# EAGLE board BLEduino (EAGLE 6.5.0)
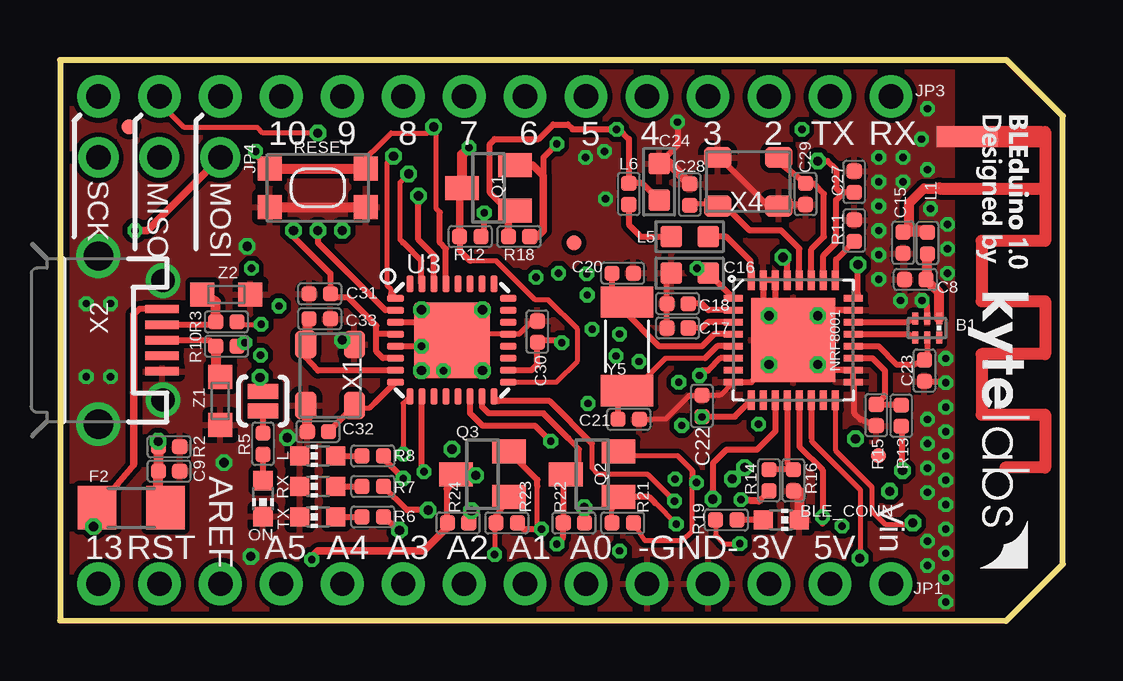
[diagram p0: board, top side]
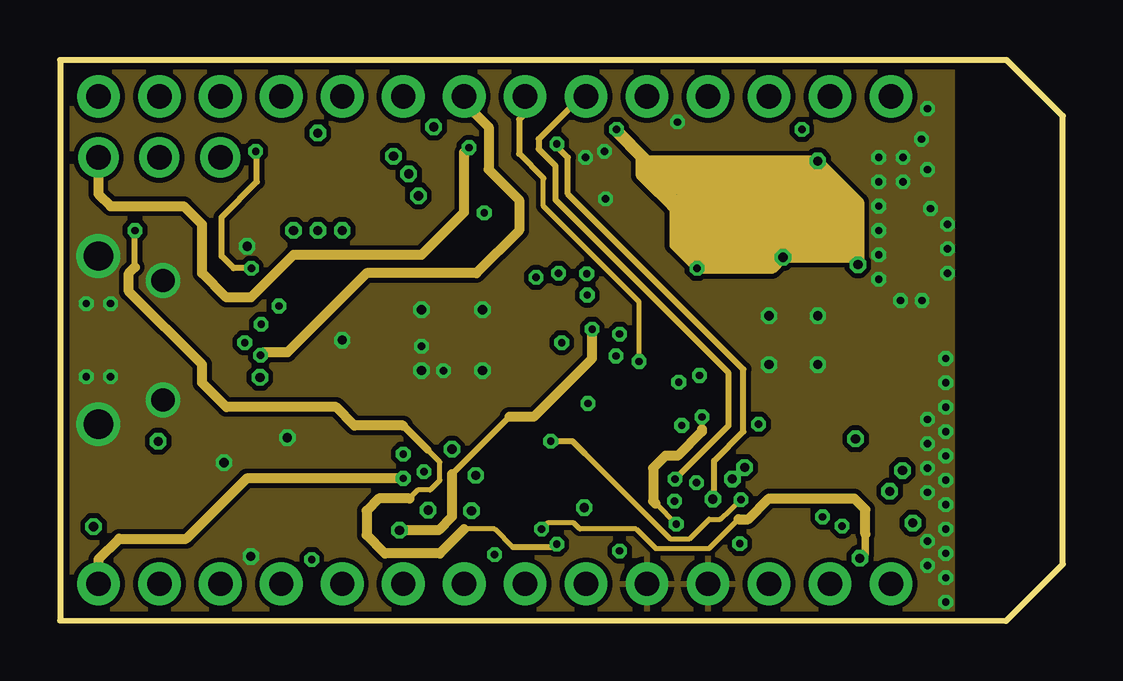
[diagram p1: board, inner layer Inner-Top]
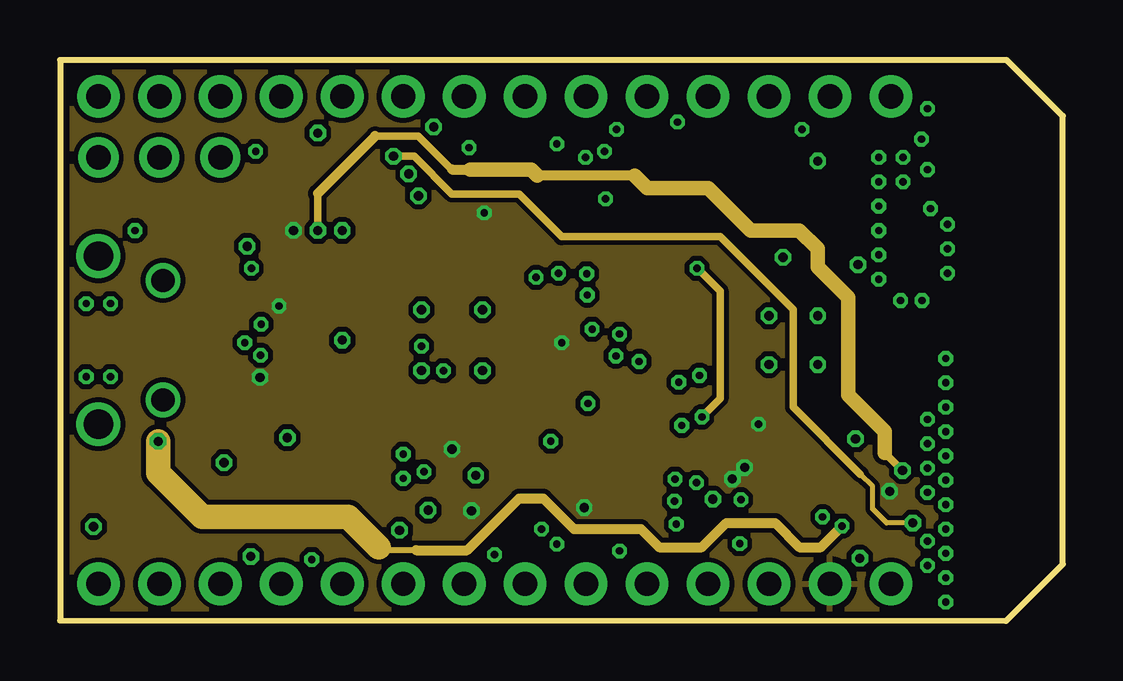
[diagram p2: board, inner layer 5V]
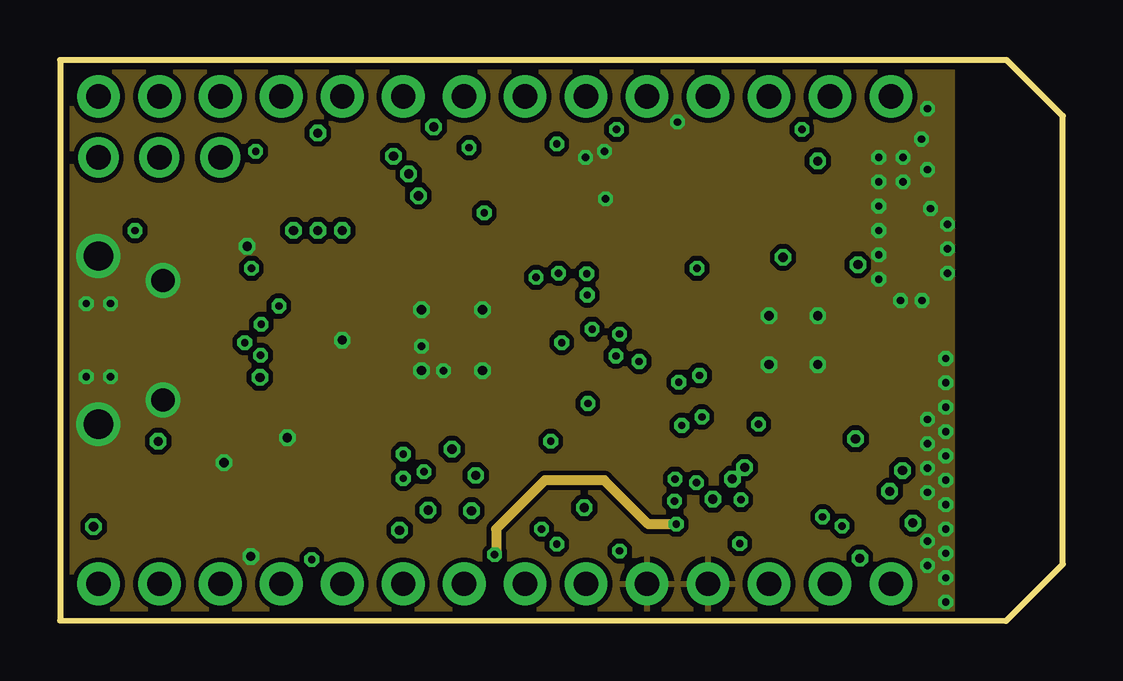
[diagram p3: board, inner layer GND]
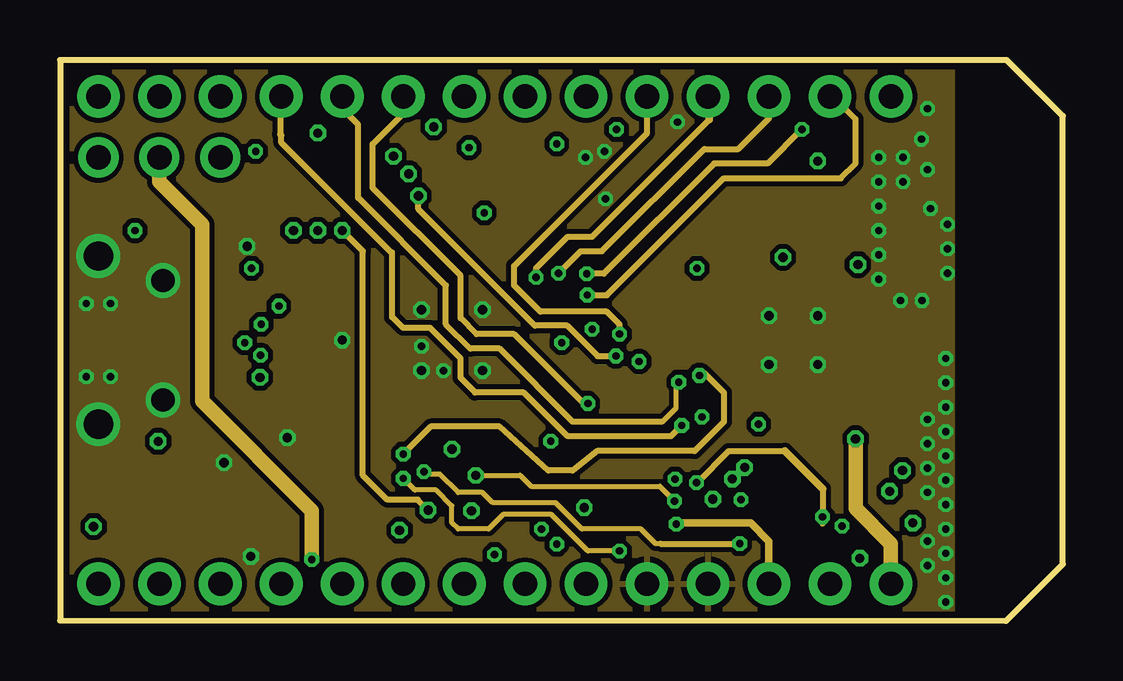
[diagram p4: board, inner layer Inner-Bottom]
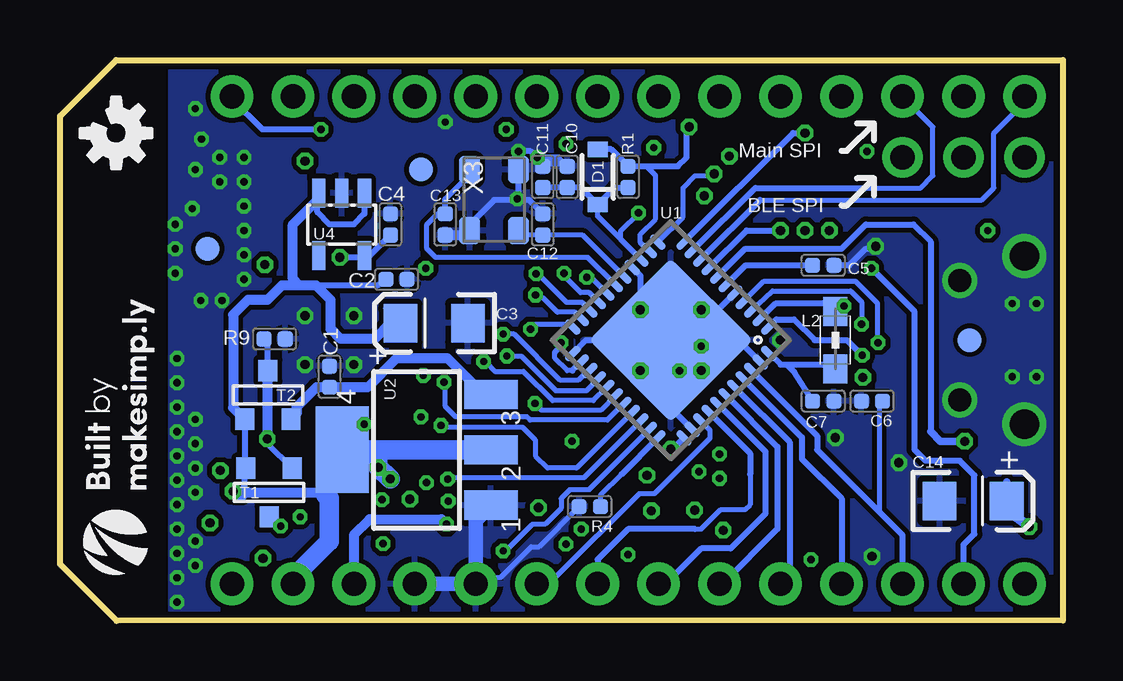
[diagram p5: board, bottom side, seen from below]

Size 41.78 x 23.39 mm. Coordinates in mm from the lower left corner, seen from the top.
Outline: 39.45,23.39 0,23.39 0,0.03 39.42,0 41.78,2.36 41.78,21.06 39.45,23.39
Copper layers (1*2*3*14*15*16): Top 0.035mm / dielectric 0.2mm / Inner-Top 0.0175mm / dielectric 0.2mm / 5V 0.0175mm / dielectric 0.66mm / GND 0.0175mm / dielectric 0.2mm / Inner-Bottom 0.0175mm / dielectric 0.2mm / Bottom 0.035mm
Design rules "SeeedStudio_DRU_no_angle_20130527_6_LAYERS *": minimum track width 6mil, minimum drill 12mil, track to track 6mil, track to pad 6mil, pad to pad 6mil, via to via 6mil, smd to smd 0mil, copper to edge 10mil, drill to drill 10mil, minimum pad ring 6mil, minimum via ring 6mil, stop-mask expansion 2mil, vias tented up to drill 25mil, thermal gap 10mil
Net classes: 0 default: width 0.203 mm

## Footprints (pad centres in the part's own frame; a part is rotated, then mirrored left to right if it is on the bottom)
RN-ANT = smd 0.025 x 0.025: FEED 0,2.159 | smd 2.54 x 0.889: GND -1.143,0
BALUN-0603 = smd 0.25 x 0.5: 1 0.5,0.394; 2 0,0.394; 3 -0.5,0.394; 4 -0.5,-0.406; 5 0,-0.406; 6 0.5,-0.406
CHIP-LED0603 = smd 0.8 x 0.8: A 0,-0.75; C 0,0.75
C0402 = smd 0.635 x 0.635: 1 -0.445,0; 2 0.445,0
EIA3216 = smd 1.4 x 1.6: A 1.4,0; C -1.4,0
C0603 = smd 0.889 x 0.889: 1 -0.762,0; 2 0.762,0
SOD-323 = smd 0.63 x 0.83: 1 -1.15,0; 2 1.15,0
R1206 = smd 1.6 x 1.803: 1 -1.422,0; 2 1.422,0
1X14-CB = drill 1.016 pad 1.778: 1 -16.51,0; 2 -13.97,0; 3 -11.43,0; 4 -8.89,0; 5 -6.35,0; 6 -3.81,0; 7 -1.27,0; 8 1.27,0; 9 3.81,0; 10 6.35,0; 11 8.89,0; 12 11.43,0; 13 13.97,0; 14 16.51,0
MICRO-FIDUCIAL = smd 0.635 x 0.635: 1 0,0
1X03-CLEANBIG = drill 1.016 pad 1.676: 1 -2.54,0; 2 0,0; 3 2.54,0
L0402 = smd 0.635 x 0.635: 1 -0.445,0; 2 0.445,0
0805 = smd 1.2 x 1: 1 -1.2,0; 2 1.2,0
L0603 = smd 0.889 x 0.889: 1 -0.762,0; 2 0.762,0
FITNESSDEVICE_QFN-32 = smd 0.285 x 0.8: 1 -1.75,-2.5; 2 -1.25,-2.5; 3 -0.75,-2.5; 4 -0.25,-2.5; 5 0.25,-2.5; 6 0.75,-2.5; 7 1.25,-2.5; 8 1.75,-2.5; 17 1.75,2.5; 18 1.25,2.5; 19 0.75,2.5; 20 0.25,2.5; 21 -0.25,2.5; 22 -0.75,2.5; 23 -1.25,2.5; 24 -1.75,2.5 | smd 0.8 x 0.285: 9 2.5,-1.75; 10 2.5,-1.25; 11 2.5,-0.75; 12 2.5,-0.25; 13 2.5,0.25; 14 2.5,0.75; 15 2.5,1.25; 16 2.5,1.75; 25 -2.5,1.75; 26 -2.5,1.25; 27 -2.5,0.75; 28 -2.5,0.25; 29 -2.5,-0.25; 30 -2.5,-0.75; 31 -2.5,-1.25; 32 -2.5,-1.75 | smd 3.5 x 3.5: EP 0,0
SOT23 = smd 1 x 1.4: 1 -0.95,-1.1; 2 0.95,-1.1; 3 0,1.1
R0402 = smd 0.635 x 0.635: 1 -0.445,0; 2 0.445,0
KMR2 = smd 1 x 1: 1 2,0.8; 2 2,-0.8; 3 -2,0.8; 4 -2,-0.8
SJ_2S-NOTRACE = smd 0.635 x 1.27: 1 -0.401,0; 2 0.413,0
SOT-23 = smd 0.787 x 0.889: 1 0.025,-1.016; 2 -0.94,1.016; 3 0.991,1.016
QFN44ML7X7 = smd 0.75 x 0.275: 1 -3.275,2.5; 2 -3.275,2; 3 -3.275,1.5; 4 -3.275,1; 5 -3.275,0.5; 6 -3.275,0; 7 -3.275,-0.5; 8 -3.275,-1; 9 -3.275,-1.5; 10 -3.275,-2; 11 -3.275,-2.5; 23 3.275,-2.5; 24 3.275,-2; 25 3.275,-1.5; 26 3.275,-1; 27 3.275,-0.5; 28 3.275,0; 29 3.275,0.5; 30 3.275,1; 31 3.275,1.5; 32 3.275,2; 33 3.275,2.5 | smd 0.275 x 0.75: 12 -2.5,-3.275; 13 -2,-3.275; 14 -1.5,-3.275; 15 -1,-3.275; 16 -0.5,-3.275; 17 0,-3.275; 18 0.5,-3.275; 19 1,-3.275; 20 1.5,-3.275; 21 2,-3.275; 22 2.5,-3.275; 34 2.5,3.275; 35 2,3.275; 36 1.5,3.275; 37 1,3.275; 38 0.5,3.275; 39 0,3.275; 40 -0.5,3.275; 41 -1,3.275; 42 -1.5,3.275; 43 -2,3.275; 44 -2.5,3.275 | smd 4.826 x 4.826: EXP 0,0
LINEAR_SOT223 = smd 1.219 x 2.235: 1 -2.311,-3.099; 2 0,-3.099; 3 2.311,-3.099 | smd 3.6 x 2.2: 4 0,3.099
MLF32X-W/HEAT = smd 0.7 x 0.3: 1 -2.35,1.75; 2 -2.35,1.25; 3 -2.35,0.75; 4 -2.35,0.25; 5 -2.35,-0.25; 6 -2.35,-0.75; 7 -2.35,-1.25; 8 -2.35,-1.75; 17 2.35,-1.75; 18 2.35,-1.25; 19 2.35,-0.75; 20 2.35,-0.25; 21 2.35,0.25; 22 2.35,0.75; 23 2.35,1.25; 24 2.35,1.75 | smd 0.3 x 0.7: 9 -1.75,-2.35; 10 -1.25,-2.35; 11 -0.75,-2.35; 12 -0.25,-2.35; 13 0.25,-2.35; 14 0.75,-2.35; 15 1.25,-2.35; 16 1.75,-2.35; 25 1.75,2.35; 26 1.25,2.35; 27 0.75,2.35; 28 0.25,2.35; 29 -0.25,2.35; 30 -0.75,2.35; 31 -1.25,2.35; 32 -1.75,2.35 | smd 3.175 x 3.175: HEAT 0,0
SOT23-DBV = smd 0.55 x 1.2: 1 -0.95,-1.3; 2 0,-1.3; 3 0.95,-1.3; 4 0.95,1.3; 5 -0.95,1.3
FIDUCIAL-1X2 = smd 1 x 1: 1 0,0
4P-SMD-3.2X2.5 = smd 1.143 x 0.889: 1 -1.27,1.016; 2 -1.27,-1.016; 3 1.27,-1.016; 4 1.27,1.016
SPARKFUN_USB-MICROB = smd 0.35 x 1.4: D+ 0,2.65; D- -0.65,2.65; GND 1.3,2.65; ID 0.65,2.65; VBUS -1.3,2.65
FITNESSDEVICE_CRYSTAL-ABS10 = smd 1.3 x 2.2: P$1 -1.85,0; P$2 1.85,0
CT/CN0603 = smd 1 x 1: 1 -1,0; 2 1,0

## Placement (x,y rotation side)
ANT1  ANTENNA  [RN-ANT]  36.65,20.19 180 top
B1  BALUN0603  [BALUN-0603]  36.13,12.22 0 top
BLE_CONN  blue  [CHIP-LED0603]  30.05,4.22 270 top
C1  100n  [C0402]  30.56,10.19 90 bottom
C2  100n  [C0402]  27.76,14.25 0 bottom
C3  22u  [EIA3216]  26.19,12.42 180 bottom
C4  1uF  [C0402]  28.02,16.54 90 bottom
C5  1uF  [C0402]  9.98,14.83 0 bottom
C6  100n  [C0402]  7.95,9.17 180 bottom
C7  1uF  [C0402]  9.98,9.17 0 bottom
C8  n/a  [C0402]  35.64,14.24 180 top
C9  100n  [C0402]  4.55,6.25 0 top
C10  100n  [C0402]  20.65,18.52 90 bottom
C11  100n  [C0402]  21.67,18.52 90 bottom
C12  22pF  [C0402]  21.67,16.54 270 bottom
C13  22pF  [C0402]  25.73,16.54 90 bottom
C14  22u  [EIA3216]  3.73,5 0 bottom
C15  n/a  [C0402]  35.13,15.77 270 top
C16  1uF  [C0603]  26.24,14.5 180 top
C17  33nF  [C0402]  25.73,12.22 180 top
C18  100nF  [C0402]  25.73,13.23 180 top
C20  15pF  [C0402]  23.44,14.5 0 top
C21  15pF  [C0402]  23.7,8.41 0 top
C22  100nF  [C0402]  26.75,8.97 270 top
C23  2.2nF  [C0402]  36.02,10.44 90 top
C24  1uF  [C0603]  24.97,18.31 90 top
C27  1nF  [C0402]  33.1,18.31 90 top
C28  15pF  [C0402]  26.24,17.78 90 top
C29  15pF  [C0402]  31.06,17.81 270 top
C30  100n  [C0402]  19.89,12.06 90 top
C31  100n  [C0402]  10.82,13.64 180 top
C32  22p  [C0402]  10.74,7.9 180 top
C33  22p  [C0402]  10.82,12.6 0 top
D1  [SOD-323]  19.38,18.52 90 bottom
F2  [R1206]  2.97,4.72 180 top
JP1  [1X14-CB]  18.11,1.55 0 top
JP2  FIDUCIALUFIDUCIAL  [MICRO-FIDUCIAL]  34.11,6.88 0 top
JP3  [1X14-CB]  18.11,21.87 0 top
JP4  [1X03-CLEANBIG]  4.14,19.33 0 top
JP5  FIDUCIALUFIDUCIAL  [MICRO-FIDUCIAL]  21.41,15.77 0 top
JP6  FIDUCIALUFIDUCIAL  [MICRO-FIDUCIAL]  2.87,20.6 0 top
L  yellow  [CHIP-LED0603]  10.74,6.88 90 top
L1  n/a  [L0402]  36.14,15.76 90 top
L2  MH2029-300Y  [0805]  9.47,11.71 270 bottom
L5  10uH  [L0603]  26.24,16.03 180 top
L6  15nH  [L0402]  23.7,17.81 90 top
LOGO_BOTTOM  [OSHW-LOGO-S]  39.45,20.35 135 top
LOGO_TOP  [V3_KYTELABS_TOP]  38.43,21.08 270 top
NRF8001  FITNESSDEVICE_NRF8001  [FITNESSDEVICE_QFN-32]  30.56,11.71 270 top
ON  green  [CHIP-LED0603]  8.46,5.11 180 top
Q1  BSS138  [SOT23]  17.86,18.06 90 top
Q2  BSS138  [SOT23]  22.17,6.12 90 top
Q3  BSS138  [SOT23]  17.6,6.12 90 top
R1  10K  [R0402]  18.11,18.52 90 bottom
R2  10K  [R0402]  4.55,7.26 180 top
R3  22  [R0402]  6.93,12.47 180 top
R4  10K  [R0402]  19.71,4.78 180 bottom
R5  1K  [R0402]  8.46,7.39 270 top
R6  1K  [R0402]  13.03,4.34 180 top
R7  1K  [R0402]  13.03,5.61 180 top
R8  1K  [R0402]  13.03,6.88 180 top
R9  10K  [R0402]  32.84,11.76 180 bottom
R10  22  [R0402]  6.93,11.46 180 top
R11  22K  [R0402]  33.1,16.28 90 top
R12  10K  [R0402]  17.09,16.03 180 top
R13  10K  [R0402]  35.05,8.56 90 top
R14  10K  [R0402]  29.54,5.87 90 top
R15  20K  [R0402]  34.01,8.59 90 top
R16  20K  [R0402]  30.56,5.87 90 top
R18  10K  [R0402]  19.13,16.03 180 top
R19  1K  [R0402]  27.76,4.22 180 top
R21  10K  [R0402]  23.44,4.09 180 top
R22  10K  [R0402]  21.41,4.09 180 top
R23  10K  [R0402]  18.62,4.09 180 top
R24  10K  [R0402]  16.59,4.09 180 top
RESET  SPST_TACT-KMR2  [KMR2]  10.74,18.06 0 top
RX  yellow  [CHIP-LED0603]  10.74,5.61 90 top
SILK_2  [V3_MAKESIMPLY_BOTTOM]  37.67,1.8 90 bottom
SJ1  SOLDERJUMPERNC2  [SJ_2S-NOTRACE]  8.46,9.17 270 top
T1  FDN340P/PMV48XP  [SOT-23]  33.1,5.36 0 bottom
T2  PMV48XP  [SOT-23]  33.1,9.42 180 bottom
TX  yellow  [CHIP-LED0603]  10.74,4.34 90 top
U1  ATMEGA32U4-XUMU  [QFN44ML7X7]  16.33,11.71 225 bottom
U2  NCP1117-5  [LINEAR_SOT223]  26.92,7.14 90 bottom
U3  ATMEGA8/168/328MLF  [MLF32X-W/HEAT]  16.33,11.71 0 top
U4  LP2985-33DBVR  [SOT23-DBV]  30.05,16.54 180 bottom
U$28  FIDUCIAL1X2  [FIDUCIAL-1X2]  3.89,11.71 0 bottom
U$29  FIDUCIAL1X2  [FIDUCIAL-1X2]  26.75,18.82 0 bottom
U$53  FIDUCIAL1X2  [FIDUCIAL-1X2]  35.64,15.52 0 bottom
X1  [4P-SMD-3.2X2.5]  11.25,10.26 90 top
X2  SPARKFUN_USB-MICROB  [SPARKFUN_USB-MICROB]  1.6,11.71 270 top
X3  [4P-SMD-3.2X2.5]  23.7,17.55 270 bottom
X4  [4P-SMD-3.2X2.5]  28.68,18.31 180 top
Y5  Y5  [FITNESSDEVICE_CRYSTAL-ABS10]  23.62,11.46 270 top
Z1  CG0603MLC-05E  [CT/CN0603]  6.68,9.17 270 top
Z2  CG0603MLC-05E  [CT/CN0603]  6.93,13.61 0 top

## Library data of the parts
ANT1 BLE_CONN F2 JP1 JP3 JP4 L ON Q1-Q3 RESET RX TX = adafruit
B1 C3 C14 D1 JP2 JP5 JP6 LOGO_BOTTOM SJ1 U$28 U$29 U$53 = SparkFun
C1 C2 C4-C13 C15-C18 C20-C24 C27-C33 L1 L5 L6 R1-R16 R18 R19 R21-R24 X1 X3 X4 = Discrete
L2 = Wuerth_Elektronik_eiSos_V6
LOGO_TOP SILK_2 = Custom
NRF8001 Y5 = bluetooth
T1 T2 = zetex
U1 U2 U4 = SmartPrj
U3 = IC
X2 = Micro_USB
Z1 Z2 = varistor

## Nets
3V3: C4.1 C16.1 C22.2 C24.1 C27.1 JP1.12 L6.2 NRF8001.1 NRF8001.9 NRF8001.24 NRF8001.26 NRF8001.29 Q1.1 Q2.1 Q3.1 R18.2 R21.2 R23.2 U4.5
+5V: C2.1 C3.A C10.1 C11.1 C30.1 C31.1 D1.1 JP1.13 L2.1 R1.1 R12.1 R22.1 R24.1 SJ1.1 T1.2 T2.3 U1.2 U1.14 U1.24 U1.34 U2.2 U2.4 U3.4 U3.6 U3.18 U4.1 U4.3
+VIN: C1.1 T2.2 U2.3
A0: JP1.9 U1.36
A1: JP1.8 U1.37
A2: JP1.7 U1.38
A3: JP1.6 U1.39
A4: JP1.5 U1.40
A5: JP1.4 U1.41
AREF: C6.1 JP1.3 U1.42
AVCC: C7.1 L2.2 U1.44
BLE_ACTIVE: NRF8001.6 U3.9
BLE_MISO: JP4.2 Q3.3 R24.2 U3.16
BLE_MISO_SHIFTED: NRF8001.14 Q3.2 R23.1
BLE_MOSI: JP4.3 Q2.3 R22.2 U3.15
BLE_MOSI_SHIFTED: NRF8001.13 Q2.2 R21.1
BLE_RDNY: NRF8001.16 U3.1
BLE_REQN: R14.1 U3.14
BLE_REQN_SHIFTED: NRF8001.12 R14.2 R16.2
BLE_RESET: R13.1 U3.2
BLE_RESET_SHIFTED: NRF8001.19 R13.2 R15.2
BLE_SCK: JP4.1 Q1.3 R12.2 U3.17
BLE_SCK_SHIFTED: NRF8001.11 Q1.2 R18.1
D0/RX: JP3.14 U1.20
D1/TX: JP3.13 U1.21
D2/SDA: JP3.12 U1.19
D3/SCL: JP3.11 U1.18
D4*: JP3.10 U1.25
D5*: JP3.9 U1.31
D6*: JP3.8 U1.27
D7: JP3.7 U1.1
D+: R10.2 X2.D+ Z1.1
D-: R3.2 X2.D- Z2.1
GND: ANT1.GND B1.2 BLE_CONN.C C1.2 C2.2 C3.C C4.2 C5.2 C6.2 C7.2 C8.2 C9.2 C10.2 C11.2 C12.1 C13.1 C14.C C15.2 C16.2 C17.2 C18.2 C20.2 C21.2 C22.1 C23.1 C24.2 C27.2 C28.2 C29.2 C30.2 C31.2 C32.2 C33.2 JP1.10 JP1.11 L.C NRF8001.8 NRF8001.17 NRF8001.18 NRF8001.23 NRF8001.30 NRF8001.31 NRF8001.EP ON.C R2.1 R4.2 R9.1 R11.2 R15.1 R16.1 RESET.2 RESET.4 RX.C TX.C U1.5 U1.15 U1.23 U1.35 U1.43 U1.EXP U2.1 U3.3 U3.5 U3.21 U3.HEAT U4.2 X1.1 X1.3 X2.GND X3.1 X3.3 X4.1 X4.3 Z1.2 Z2.2
HWB: R4.1 U1.33
IO8: JP3.6 U1.28
IO9*: JP3.5 U1.29
IO10*: JP3.4 U1.30
IO11*: U1.12 U3.31
IO12*: U1.26 U3.30
IO13*: JP1.1 R8.1 U1.32
MISO: JP3.2 U1.11
MOSI: JP3.3 U1.10
N$1: C33.1 U3.7 X1.4
N$2: R7.2 RX.A
N$3: ON.A R5.2
N$4: R6.2 TX.A
N$5: C32.1 U3.8 X1.2
N$6: R19.2 U3.10
N$7: L.A R8.2
N$8: BLE_CONN.A R19.1
N$9: ANT1.FEED C15.1 L1.2
N$13: C18.1 NRF8001.2
N$14: R5.1 SJ1.2
N$15: L5.1 NRF8001.32
N$17: L5.2 L6.1
N$18: C17.1 NRF8001.3
N$19: C20.1 NRF8001.4 Y5.P$1
N$20: C21.1 NRF8001.5 Y5.P$2
N$23: B1.5 C23.2 NRF8001.20
N$24: B1.3 NRF8001.22
N$25: B1.4 NRF8001.21
N$26: B1.1 C8.1 L1.1
N$28: NRF8001.25 R11.1
N$29: C28.1 NRF8001.28 X4.4
N$30: C29.1 NRF8001.27 X4.2
RD_N: R3.1 U1.3
RD_P: R10.1 U1.4
RESET: D1.2 JP1.2 R1.2 RESET.1 RESET.3 U1.13 U3.29
RXLED/SS: R7.1 U1.8
SCK: JP3.1 U1.9
TXLED: R6.1 U1.22
UCAP: C5.1 U1.6
VIN: JP1.14 R9.2 T1.3 T2.1
VUSB: C9.1 F2.1 R2.2 T1.1 U1.7
VUSBD: C14.A F2.2 X2.VBUS
XTAL1: C13.2 U1.17 X3.2
XTAL2: C12.2 U1.16 X3.4

## Tracks (layer width: path | path; a pad name or v marks a point on that pad's centre or on a via)
3V3  (via drill 0.3, 0.38)
  Top 0.203: R21.2 23,4.64 Q2.1 | 24.8,4.92 v25.68,4.04 | R23.2 18.11,3.77 v18.11,2.77
  Top 0.254: NRF8001.1 C16.1 26.77,14.5 v26.54,14.71 | C22.2 28.12,8.52 NRF8001.9 | NRF8001.24 33.25,13.65 v33.25,14.86 | 30.31,15.01 30.15,15.16 v30.12,15.16 30.31,14.98 NRF8001.29 | Q3.1 18.17,4.39 R23.2 | Q1.1 18.65,17.11 17.91,17.86 17.91,19.89 18.11,20.09 19.94,20.09 20.55,20.7 21.16,20.7 21.36,20.5 v23.19,20.5 23.29,20.5 23.7,20.09 L6.2 24.27,18.25 C24.1 | NRF8001.26 31.81,15.25 32.33,15.77 32.33,17.55 32.59,17.81 | v31.57,19.18 31.98,19.18 32.33,18.82 32.33,18.06 32.59,17.81 | C27.1 32.65,17.87 32.59,17.81 | 24.8,4.92 24.55,5.17 Q2.1
  Top 0.305: Q1.1 18.68,16.88 R18.2 | C22.2 v26.75,8.51
  Inner-Top 0.203: v26.75,8.51 26.75,8 | 24.82,4.9 v25.68,4.04 | 24.71,18.82 24.71,18.97 v23.19,20.5 | 29.54,15.27 29.79,15.27 30.02,15.27 v30.12,15.16 | v31.57,19.18 31.6,19.18 31.64,19.14
  Inner-Top 0.406: v23.19,20.5 23.19,20.4 | 30.12,15.14 29.67,14.68 26.59,14.68 v26.54,14.71 25.6,15.67 25.6,17.17 25.98,17.55 25.73,17.55 25.48,17.3 25.48,17.81 24.71,18.57 24.71,18.82 24.21,19.33 | v23.19,20.5 24.49,19.2 31.57,19.2 31.64,19.14 33.3,17.48 33.3,14.91 v33.25,14.86 32.94,15.16 v30.12,15.16 | 26.75,8 26.75,7.9 25.73,6.88 25.22,6.88 24.71,6.38 24.71,5 24.82,4.9 | v23.19,20.5 23.19,20.35 24.21,19.33 | 23.19,20.6 v23.19,20.5 | 25.98,17.04 25.73,17.04 24.21,18.57 24.21,19.33
  Inner-Top 0.813: 32.84,15.77 32.84,17.3 31.32,18.82 25.22,18.82 | 24.71,18.82 25.22,18.82 | 25.22,18.82 26.49,17.55 | 26.49,17.55 26.49,16.54 27,16.03 29.54,16.03 29.79,16.28 32.33,16.28 32.33,16.79 31.06,18.06 26.75,18.06 26.49,18.31 26.49,17.55 | 26.49,17.55 27.25,16.79 31.32,16.79 | 31.57,16.79 31.32,16.79 | 31.32,16.79 30.81,17.3 27.51,17.3 27.25,17.55 | 25.98,17.04 25.98,16.03 26.75,15.27 29.54,15.27 | 29.79,15.27 30.05,15.52 32.84,15.52
  5V 0.305: v26.54,14.71 27.51,13.77 27.51,9.27 v26.75,8.51
  GND 0.406: v25.68,4.04 24.51,4.04 22.68,5.87 20.21,5.87 18.17,3.84 18.17,2.83 v18.11,2.77
  Inner-Bottom 0.305: JP1.12 29.54,3.33 28.78,4.09 25.73,4.09 v25.68,4.04
  Bottom 0.254: v30.12,15.16 29.17,15.16 U4.5 28.87,15.24 C4.1 27.95,16.09
  Bottom 0.406: v25.68,4.04 25.88,4.24 28.88,4.24 29.54,3.58 JP1.12
+5V  (via drill 0.3, 0.38)
  Top 0.254: U3.6 13.45,10.96 13.18,11.23 13.18,11.96 | U3.4 13.8,11.96 13.79,11.96 13.18,11.96 | 21.92,4.03 R22.1 21.86,4.41 v21.84,4.72 | R24.1 17.03,4.56 v17.15,4.6 | SJ1.1 8.46,10.03 v8.33,10.16 | U3.18 19.65,10.46 19.89,10.69 C30.1 19.89,11.71 20.8,11.71 v20.9,11.61 | R12.1 17.68,16.03 v17.68,17.02 | v9.73,16.28 9.73,16.03 11.27,14.49 C31.1 11.42,13.49 12.01,13.49 13.18,12.32 13.18,11.96
  Bottom 0.203: D1.1 19.38,16.88 U1.14 17.6,15.09 18.42,15.9 18.42,16.28 v17.68,17.02 | 20.43,10.44 20.65,10.44 21.16,10.95 21.16,11.2
  Bottom 0.254: C11.1 C10.1 20.09,18.07 D1.1 18.68,18.07 R1.1 | L2.1 9.9,13.23 11.98,13.23 U1.2 | T2.3 34.09,6.43 T1.2 34.11,6.3 34.11,5.61 34.49,5.23 v34.57,5.41 | C3.A 28.21,13.04 | L2.1 9.47,12.47 | U4.1 29.1,16.98 29.54,16.54 30.56,16.54 31.06,17.04 31.06,17.77 U4.3 | C2.1 28.27,14.25 28.52,14 31.12,14 | U1.34 16.27,7.16 v16.33,7.16 | L2.1 9.44,12.81 v9.12,13.13 | 21.16,11.2 20.9,11.46 v20.9,11.61 | 20.43,10.44 U1.24
  Bottom 0.305: v29.11,8.2 29.11,7.21 29.03,7.14
  Bottom 0.406: 34.49,5.23 34.19,5.23 34.06,5.36 30.81,5.36 | 30.81,5.36 30.1,6.07 30.1,7.06 U2.4 | 30.71,5.26 30.81,5.36 | C3.A 28.02,12.42 28.68,11.76 30.1,11.76 30.51,12.17 30.51,13.39 31.12,14 31.83,14 | 31.83,14 32.54,14 33.15,13.39 33.96,13.39 34.57,12.78 34.57,8.89 T2.3 | 31.83,14 32.08,14.25 32.08,16.54 31,17.62 U4.3
  Bottom 0.813: U2.2 29.03,7.14 U2.4 28.58,7.09 v28.52,6.4 v28.02,5.92 | JP1.13 32.08,1.8 30.56,3.33 30.56,5.11 30.71,5.26
  pour 5V (isolate 0.203): -2.72,26.19 37.16,26.19 37.16,-2.77 -2.72,-2.77
+VIN
  Bottom 0.406: T2.2 31.93,8.64 31.93,8.92 31.1,9.74 C1.1 28.97,9.74 27.76,10.95 25.63,10.95 24.54,9.86 24.54,9.45 U2.3
A0
  Bottom 0.203: U1.36 14.71,7.96 14.71,7.62 17.02,5.31 17.65,5.31 21.16,1.8 21.79,1.8
  Bottom 0.254: 21.79,1.8 21.92,1.68 JP1.9
A1
  Bottom 0.203: 15.32,3.84 15.06,3.84 14.25,4.65 13.23,4.65 13.03,4.85 13.03,6.12
  Bottom 0.254: U1.37 13.03,6.99 13.03,6.12 | 15.32,3.84 18.11,3.84 19.38,2.57 JP1.8
A2
  Bottom 0.254: U1.38 12.4,7.07 12.4,4.47 13.84,3.02 15.06,3.02 16.54,1.55 JP1.7
A3
  Bottom 0.254: U1.39 11.89,7.26 11.89,3.84 14.17,1.55 JP1.6
A4
  Bottom 0.254: U1.40 11.38,7.46 11.38,2.06 11.76,1.68 JP1.5
A5
  Bottom 0.254: U1.41 10.87,7.66 10.87,6.76 9.22,5.11 JP1.4
AREF
  Bottom 0.203: C6.1 7.65,9.03 7.65,4.55
  Bottom 0.254: U1.42 12.96,10.44 10.24,7.72 10.24,7.14 7.65,4.55 6.68,3.58 JP1.3
AVCC
  Bottom 0.254: U1.44 12.23,11.16 11.76,10.69 11.51,10.69 | 11.51,10.69 9.56,10.69 L2.2 | C7.1 11.19,10.38 11.51,10.69
BLE_ACTIVE  (via drill 0.3)
  Top 0.203: U3.9 14.3,9.08 v14.3,6.96
  Top 0.254: NRF8001.6 27.52,10.96 27,10.44 26.75,10.44 v26.64,10.24
  Inner-Bottom 0.254: v26.64,10.24 26.85,10.34 27.66,9.53 27.66,8.31 26.44,7.09 22.38,7.09 21.36,6.27 20.35,6.27 18.31,8.1 15.44,8.1 v14.3,6.96
BLE_MISO  (via drill 0.3, 0.38)
  Top 0.203: Q3.3 v17.32,6.07 | U3.16 18.08,9.15 | v25.6,5 24.49,6.12 22.43,6.12 22.17,6.38 22.17,7.39
  Top 0.254: 16.14,5.51 R24.2 16.13,3.84 16.1,3.86 | 22.17,7.39 20.4,9.17 18.27,9.17 U3.16
  Top 0.305: 16.14,5.51 Q3.3 | 16.13,3.86 16.1,3.86 15.16,2.92 10.74,2.92 10.49,2.67 v10.49,2.57
  Inner-Bottom 0.203: v17.32,6.07 19.18,6.07 19.63,5.61 24.99,5.61 v25.6,5
  Inner-Bottom 0.61: v10.49,2.57 10.49,4.6 5.92,9.17 5.92,16.54 4.14,18.31 JP4.2
BLE_MISO_SHIFTED  (via drill 0.3, 0.38)
  Top 0.203: 19.89,5.63 19.89,4.01 v20.07,3.84 | 31.32,7.65 31.32,7.49 33.35,5.46 33.35,2.64 v33.33,2.62
  Top 0.254: 18.77,6.88 Q3.2 19.89,5.89 19.89,5.63 | NRF8001.14 31.31,7.66 31.32,7.65 | R23.1 19.32,3.84 v20.07,3.84
  Inner-Top 0.203: 28.27,4.24 27.05,3.02 24.82,3.02 24,3.84 21.67,3.84 21.41,4.09 20.32,4.09 v20.07,3.84
  Inner-Top 0.305: 33.55,3.63 33.55,2.77 33.48,2.77 v33.33,2.62
  Inner-Top 0.406: 28.27,4.24 28.68,4.24 29.54,5.11 33.1,5.11 33.55,4.65 33.55,3.63
BLE_MOSI  (via drill 0.3)
  Top 0.203: 21.41,6.21 Q2.3 21.64,6.18 21.64,7.16 21.18,7.62
  Top 0.254: Q2.3 20.97,5.76 R22.2 | R22.2 20.96,3.82 | 21.18,7.62 20.14,8.66 17.86,8.66 17.58,8.94 U3.15 | v20.7,3.2 20.97,3.47 R22.2
  Top 0.305: JP4.3 3.63,16.28 v3.12,16.28
  Inner-Top 0.203: 16.84,3.84 18.11,3.84 18.87,3.07 | 14.55,5.11 14.91,5.46 15.42,5.46 15.82,5.87 15.82,6.63 15.32,7.14
  Inner-Top 0.254: 3.12,14.76 v3.12,16.28 | v20.7,3.2 20.57,3.07 18.87,3.07
  Inner-Top 0.305: 15.32,7.14 14.3,8.15
  Inner-Top 0.406: 16.84,3.84 15.82,2.82 13.54,2.82 12.78,3.58 12.78,4.6 13.28,5.11 14.55,5.11 | 14.3,8.15 12.27,8.15 11.51,8.92 6.93,8.92 5.92,9.93 5.92,10.69 2.87,13.74 2.87,14.5 3.12,14.76
BLE_MOSI_SHIFTED  (via drill 0.3)
  Top 0.203: Q2.2 23.34,6.88 25.73,6.88 26.34,6.27 26.34,3.76 25.93,3.35 24.37,3.35 R21.1
  Top 0.254: NRF8001.13 30.81,7.27 31.78,6.3 v31.78,4.34 31.78,4.06 | 26.34,6.27 26.34,5.94 v26.52,5.77
  Inner-Bottom 0.254: v26.52,5.77 26.54,5.77 27.86,7.09 30.2,7.09 | 31.78,5.51 v31.78,4.34 31.78,4.06
  Inner-Bottom 0.305: 30.2,7.09 31.78,5.51
BLE_RDNY  (via drill 0.38)
  Top 0.203: 13.79,13.65 13.79,13.82 13.64,13.97 13.64,19.13 v13.89,19.38 | NRF8001.16 32.31,7.11 33.83,5.59 33.83,4.6 34.39,4.04 35.31,4.04
  Top 0.254: U3.1 13.79,13.65 | 35.31,4.04 35.48,4.04 v35.53,4.09
  5V 0.203: v35.53,4.09 34.44,4.09 33.86,4.67 33.86,5.61 33.35,6.12
  5V 0.305: v13.89,19.38 14.76,19.38 16.33,17.81 19.13,17.81 20.9,16.03 27.51,16.03 30.56,12.98 30.56,8.92 33.35,6.12
BLE_REQN  (via drill 0.3)
  Top 0.203: 29.17,5.05 R14.1
  Top 0.254: U3.14 17.08,8.67 17.6,8.15 19.79,8.15 v20.45,7.49
  Top 0.305: v28.37,5.05 29.12,5 29.17,5.05
  Inner-Top 0.203: 21.87,6.99 25.43,3.43 26.24,3.43 27.05,4.24 27.51,4.24 v28.37,5.05
  Inner-Top 0.254: 21.87,6.99 21.36,7.49 v20.45,7.49
BLE_REQN_SHIFTED
  Top 0.254: NRF8001.12 30.31,8.41 | 30.31,8.41 30.3,8.41 | 30.31,8.41 30.31,6.56 R16.2 R14.2
BLE_RESET  (via drill 0.38)
  Top 0.254: U3.2 13.56,12.96 10.74,15.77 v10.74,16.28 | v35.1,6.27 35.1,8.32 R13.1
  5V 0.305: v35.1,6.27 34.37,7.01 | 16.33,18.82 14.94,20.22 13.13,20.22 | 10.74,17.83 v10.74,16.28
  5V 0.406: 13.13,20.22 10.74,17.83 | 23.95,18.57 19.89,18.57 | 16.33,18.82 17.09,18.82
  5V 0.61: 34.37,7.01 34.37,7.9 32.84,9.42 32.84,13.49 31.57,14.76 31.57,15.52 30.81,16.28 28.78,16.28 27,18.06 24.46,18.06 23.95,18.57 | 19.89,18.57 19.63,18.82 17.09,18.82
BLE_RESET_SHIFTED
  Top 0.254: R13.2 35.03,9.03 R15.2 34.37,9.39 34.37,10.44 33.85,10.96 NRF8001.19
BLE_SCK  (via drill 0.3)
  Top 0.203: U3.17 20.68,9.96 21.56,10.85 21.56,12.17 20.35,13.39 19.81,13.39 18.19,15.01 17.09,15.01
  Top 0.254: R12.2 16.65,15.46 17.09,15.01
  Top 0.305: R12.2 16.65,17.91 Q1.3
  Top 0.406: Q1.3 16.76,19.45 v17.04,19.74
  Inner-Top 0.406: JP4.1 1.6,17.81 2.11,17.3 5.16,17.3 5.92,16.54 5.92,14.5 6.93,13.49 7.95,13.49 9.73,15.27 15.06,15.27 16.84,17.04 16.84,19.53 v17.04,19.74
BLE_SCK_SHIFTED  (via drill 0.3, 0.38)
  Top 0.203: 19.89,16.03 19.94,16.03 20.14,16.23
  Top 0.254: NRF8001.11 29.81,7.91 29.03,7.14 27.76,7.14 27.2,6.58 v27.2,5.08 | v20.7,19.89 20.14,19.33 20.14,18.57
  Top 0.305: R18.1 19.89,16.03 20.14,16.28 20.14,18.57 19.7,19.01 Q1.2
  Inner-Top 0.203: v27.2,5.08 27.2,5.31 27.25,5.36
  Inner-Top 0.254: 27.25,5.36 27.25,6.68 28.47,7.9 28.47,10.49 21.16,17.81 21.16,19.33 20.7,19.79 v20.7,19.89
D0/RX  (via drill 0.3)
  Inner-Bottom 0.254: v30.91,20.5 29.49,19.08 27.25,19.08 22.66,14.48 v21.95,14.48
  Bottom 0.203: U1.20 20.03,13.28 20.68,13.28 21.87,14.48 v21.95,14.48
  Bottom 0.254: v30.91,20.5 33.35,20.5 34.62,21.77 JP3.14
D1/TX  (via drill 0.3)
  Inner-Bottom 0.254: v21.97,13.59 22.78,13.59 27.66,18.47 32.54,18.47 33.15,19.08 33.15,20.93 32.21,21.87 JP3.13
  Bottom 0.203: U1.21 20.33,12.88 21.06,12.88 21.64,13.46 v21.97,13.59
D2/SDA  (via drill 0.3)
  Inner-Bottom 0.254: v20.78,14.5 21.69,15.42 22.58,15.42 26.85,19.69 28.27,19.69 29.54,20.96 JP3.12
  Bottom 0.203: U1.19 19.73,13.69 20.09,13.69 20.78,14.38 v20.78,14.5
D3/SCL  (via drill 0.3)
  Inner-Bottom 0.254: v19.84,14.33 19.84,14.71 21.16,16.03 22.17,16.03 27.05,20.9
  Inner-Bottom 0.305: 27.05,20.9 27.05,21.82 JP3.11
  Bottom 0.203: U1.18 19.66,14.33 v19.84,14.33
D4*  (via drill 0.3)
  Inner-Bottom 0.254: v23.32,11.96 23.32,12.37 22.78,12.9 20.02,12.9 18.92,14 18.92,14.81 24.46,20.35 JP3.10
  Bottom 0.203: U1.25 19.77,10.45 20.19,10.03 20.93,10.03 22.86,11.96 v23.32,11.96
D5*  (via drill 0.3)
  Inner-Top 0.254: v25.63,5.92 27.86,8.15 27.86,10.34 20.65,17.55 20.65,18.97 19.94,19.69 19.94,20.09 21.72,21.87 JP3.9
  Bottom 0.203: v25.63,5.92 25.58,5.97 19.95,5.97 U1.31
D6*  (via drill 0.3)
  Inner-Top 0.203: v24.13,10.82 24.13,13.31 20.14,17.3 20.14,18.47
  Inner-Top 0.254: 20.14,18.47 19.13,19.48 19.13,20.9 19.38,21.16 JP3.8
  Bottom 0.203: U1.27 19.55,9.19 21.26,9.19 22.48,10.41 23.67,10.41 24.03,10.77 v24.13,10.82
D7  (via drill 0.3)
  Inner-Top 0.254: JP3.7 16.84,21.62 | 8.48,11.2 v8.36,11.07
  Inner-Top 0.406: 16.84,21.62 17.86,20.6 17.86,18.82 19.13,17.55 19.13,16.28 17.35,14.5 12.78,14.5 9.47,11.2 8.48,11.2
  Bottom 0.254: U1.1 11.93,12.57 11.2,12.57 10.34,11.71 8.99,11.71 v8.36,11.07
D+
  Top 0.254: X2.D+ 6.24,11.71 R10.2
  Top 0.406: R10.2 6.49,10.36 Z1.1
D-
  Top 0.254: 6.38,12.36 R3.2 | 6.39,12.37 R3.2 | X2.D- 6.49,12.36 R3.2
  Top 0.406: R3.2 6.49,13.31 Z2.1
GND  (via drill 0.3, 0.38, 0.97, 1.22)
  Top 0.203: 19.08,11.96 U3.21 | C30.2 19.67,12.51 19.13,11.96 U3.21 | U3.21 17.35,11.96 | 17.35,11.96 17.09,11.96 | 17.09,11.96 16.59,11.96 U3.HEAT | U3.HEAT 17.09,11.71 17.35,11.96 | U3.HEAT v17.6,10.44 17.6,11.46 17.09,11.96 | C22.1 26.48,9.41 | C21.2 25.22,8.41 26.23,9.41 C22.1 | NRF8001.8 27.51,9.41 C22.1 | X1.1 10.24,7.96 C32.2
  Top 0.254: 29.31,12.45 NRF8001.31 NRF8001.30 29.81,12.74 29.79,12.73 29.79,12.47 | NRF8001.EP 30.05,11.71 | 30.05,11.71 29.31,12.45 | 29.31,12.45 29.29,12.47 29.79,12.47 | 29.79,12.47 NRF8001.EP | NRF8001.EP 31.81,10.46 NRF8001.18 NRF8001.17 33.1,9.92 33.1,8.66 33.36,8.39 R15.1 | NRF8001.8 28.81,9.96 29.03,10.19 29.03,10.69 30.05,11.71 | NRF8001.23 31.81,12.96 NRF8001.EP | C17.2 25.29,14.31 C16.2 | U3.5 16.08,11.46 U3.HEAT | U3.3 15.58,12.46 U3.HEAT | 16.58,11.96 U3.HEAT | B1.2 36.13,13.15 v35.92,13.36 | C28.2 26.34,18.05 | C29.2 29.45,17.36 27.57,19.24 | v25.73,20.8 25.73,19.84 C24.2 | C23.1 36.84,9.99 v36.91,9.93
  Top 0.305: v31.57,12.73 NRF8001.EP
  Top 0.406: C32.2 10.3,8.75 | RESET.4 RESET.2 | R16.1 30.8,5.42 BLE_CONN.C | C28.2 25.4,19.08 C24.2 | C15.2 35.04,15.24 | 35.13,14.25 35.18,14.25 C8.2
  Bottom 0.203: 20.17,4.75 21.82,3.1 22.15,3.1 23.44,1.8 24.13,1.8 24.49,1.45
  Bottom 0.254: U1.5 14.36,12.98 v15.06,12.98 14.77,12.98 U1.43 | U1.15 17.6,14.39 v17.6,12.98 18.11,12.98 19.38,11.71 19.87,11.71 U1.23 | U1.35 17.6,10.15 v17.6,10.44 | R4.2 20.16,4.76 20.17,4.75 | U3.HEAT 15.57,11.71 | 20.65,19.08 21.67,19.08 21.92,19.33 | C12.1 22.24,17.55 22.68,17.55 | C10.2 21.02,19.33 21.92,19.33 | 21.92,19.33 22.17,19.58 v22.68,19.58 22.68,17.55 | 22.68,17.55 23.7,17.55 24.71,16.54 X3.3 24.97,16.03 25.73,16.03 | C5.2 8.89,14.83 8.2,15.52 7.9,15.52 v7.8,15.62
  Bottom 0.406: C13.1 24.93,16.09
  Bottom 0.61: U2.1 24.46,4.19 JP1.10 | JP1.10 JP1.11 | 24.49,1.45 24.46,1.47 JP1.10
  other vias: 15.06,10.44 6.83,6.6 11.76,11.71 29.54,10.69 29.54,12.73 31.57,10.69 9.47,7.65 34.11,18.31 22.73,17.6 7.95,2.69 1.09,10.19 2.11,10.19 2.11,13.23 1.09,13.23 4.29,14.2 4.29,9.22 1.6,15.21 1.6,8.2 36.91,10.95 35.03,13.36 34.11,14.25 34.11,15.27 34.11,16.28 34.11,17.3 34.11,19.33 36.27,17.2 36.98,16.54 36.98,15.52 36.98,14.5 36.91,8.92 36.14,8.41 36.91,7.9 36.91,6.88 36.91,5.87 36.91,4.85 36.91,3.84 36.91,2.82 36.91,1.8 36.91,0.79 36.14,21.36 35.89,20.09 36.14,18.82 35.13,18.31 35.13,19.33 36.14,7.39 36.14,6.38 36.14,5.36 36.14,3.33 36.14,2.31 21.89,19.33 15.06,11.46 15.98,10.44
  pour Top (isolate 0.203): -1.7,25.17 37.16,25.17 37.16,-1.75 -1.7,-1.75
  pour Inner-Top (isolate 0.203): -2.21,-2.26 -2.21,25.68 37.16,25.68 37.16,-2.26
  pour GND (isolate 0.203): -3.23,26.7 37.16,26.7 37.16,-3.28 -3.23,-3.28
  pour Inner-Bottom (isolate 0.203): -3.73,27.2 37.16,27.2 37.16,-3.78 -3.73,-3.78
  pour Bottom (isolate 0.203): -4.24,27.71 37.16,27.71 37.16,-4.29 -4.24,-4.29
HWB
  Bottom 0.203: 18.38,6.12 19.27,5.24 R4.1
  Bottom 0.254: 18.38,6.12 U1.33
IO8  (via drill 0.3)
  Inner-Bottom 0.203: 21.82,9.07 v22,9.07
  Inner-Bottom 0.254: 21.82,9.07 18.92,11.96 17.35,11.96 16.69,12.62 16.69,14.4 13.03,18.06 13.03,19.89 14.3,21.16 JP3.6
  Bottom 0.203: U1.28 19.25,8.79 21.72,8.79 v22,9.07
IO9*  (via drill 0.3)
  Inner-Bottom 0.203: 25.07,8.31 25.1,8.31 25.67,8.88 25.67,9.84 v25.78,9.96
  Inner-Bottom 0.254: 25.07,8.31 21.36,8.31 18.31,11.35 17.09,11.35 16.08,12.37 16.08,14 12.42,17.65 12.42,20.7 11.76,21.36 JP3.5
  Bottom 0.203: U1.29 18.32,9.04 18.97,8.38 22.2,8.38 22.33,8.51 25.3,8.51 25.73,8.94 25.73,9.91 v25.78,9.96
IO10*  (via drill 0.3)
  Inner-Bottom 0.254: v25.91,8.15 25.45,7.7 21.16,7.7 19.33,9.53 17.3,9.53 16.69,10.13 16.69,10.95 15.42,12.22 14.3,12.22 13.84,12.67 13.84,15.37 13.79,15.37 9.22,19.94 9.22,20.24 9.17,20.29 9.17,21.82 JP3.4
  Bottom 0.203: U1.30 20.25,6.38 21.46,6.38 21.97,6.88 21.97,7.54 22.5,8.08 25.83,8.08 v25.91,8.15
IO11*  (via drill 0.38)
  Top 0.203: 14.3,15.77 14.17,15.9 14.17,18.29 v14.53,18.64
  Top 0.254: U3.31 15.06,14.08 15.06,15.01 14.3,15.77
  Bottom 0.203: v14.53,18.64 14.61,18.57 15.32,18.57 15.82,18.06 15.82,16.85 U1.12
IO12*  (via drill 0.3, 0.38)
  Top 0.254: U3.30 15.58,15.25 14.94,15.9 v14.94,17.73
  Inner-Bottom 0.254: v14.94,17.73 14.94,17.17 19.79,12.32 21.13,12.32 22.4,11.05 v23.17,11.05
  Bottom 0.203: U1.26 19.85,9.6 21.11,9.6 22.56,11.05 v23.17,11.05
IO13*  (via drill 0.3)
  Top 0.254: v14.3,5.94 13.48,6.77 R8.1
  Inner-Top 0.406: JP1.1 1.6,2.57 2.46,3.43 5.26,3.43 7.77,5.94 v14.3,5.94
  Inner-Bottom 0.203: v14.3,5.94 14.78,5.46 15.67,5.46 16.33,4.8 16.33,4.09 16.59,3.84 17.86,3.84 18.47,4.45 20.47,4.45 22,2.92 v23.32,2.92
  Bottom 0.203: U1.32 19.73,5.49 20.52,5.49 20.9,5.11 20.9,4.7 21.56,4.04 22.1,4.04 23.22,2.92 v23.32,2.92
MISO  (via drill 0.38)
  Top 0.203: v10.74,20.35 8.46,20.35 8.23,20.57 5.18,20.57 4.14,21.62 JP3.2
  Bottom 0.254: U1.11 11.23,20.35 v10.74,20.35
MOSI
  Bottom 0.203: 8.2,18.06 5.92,18.06 5.41,18.57 5.41,20.6 JP3.3
  Bottom 0.254: U1.10 12.81,18.06 8.2,18.06
N$1
  Top 0.203: 10.33,11.59 10.27,11.53 X1.4 10.24,10.99
  Top 0.254: U3.7 13.96,10.44 10.74,10.44 10.24,10.99
  Top 0.406: 10.33,11.59 10.33,12.44 C33.1
N$2
  Top 0.254: RX.A R7.2
N$3
  Top 0.254: R5.2 ON.A
N$4
  Top 0.254: TX.A R6.2
N$5
  Top 0.203: 12.18,8.89 12.27,8.89 | 12.27,8.89 12.91,8.89 13.13,9.11 | X1.2 12.27,8.89
  Top 0.254: U3.8 13.13,9.11 | C32.1 12.18,8.89
N$6  (via drill 0.3)
  Top 0.203: R19.2 27.32,3.57 27.66,3.23 v28.32,3.23
  Top 0.254: U3.10 15.06,9.36 15.06,6.32 v15.16,6.22
  Inner-Bottom 0.203: 25.02,3.23 24.82,3.23 24.21,3.84 21.74,3.84 20.65,4.93 18.03,4.93 17.6,5.36 16.59,5.36 15.82,6.12 15.27,6.12 v15.16,6.22
  Inner-Bottom 0.254: 25.02,3.23 v28.32,3.23
N$7
  Top 0.254: L.A R8.2
N$8
  Top 0.254: BLE_CONN.A R19.1
N$9
  Top 0.406: C15.1 36.13,16.22 L1.2 36.07,16.28 35.38,16.28 35.38,17.42 35.99,18.03 ANT1.FEED
N$13
  Top 0.254: NRF8001.2 27.02,12.96 26.75,13.23 C18.1
N$14
  Top 0.254: SJ1.2 R5.1
N$15
  Top 0.254: NRF8001.32 28.78,14.24 28.78,15.01 27.76,16.03 L5.1
N$17
  Top 0.254: L6.1 23.7,16.54 24.21,16.03 L5.2
N$18
  Top 0.254: NRF8001.3 26.99,12.46 26.75,12.22 C17.1
N$19
  Top 0.254: NRF8001.4 27.25,11.96 26.75,11.46 24.97,11.46 23.44,12.98 Y5.P$1 23,13.75 C20.1
N$20
  Top 0.203: 26.87,10.95 25.22,10.95 24.21,9.93 23.95,9.93 Y5.P$2
  Top 0.254: C21.1 23.25,9.41 Y5.P$2 | NRF8001.5 27.39,11.46 26.87,10.95
N$23
  Top 0.254: NRF8001.20 34.11,11.46 34.87,10.69 35.57,10.69 C23.2 36.13,11.12 B1.5
N$24
  Top 0.254: 33.07,12.47 NRF8001.22 35.31,12.46 B1.3
N$25
  Top 0.254: NRF8001.21 35.32,11.96 B1.4
N$26
  Top 0.406: L1.1 36.14,14.3 C8.1 36.63,13.69 B1.1
N$28
  Top 0.254: 32.31,14.28 NRF8001.25 32.33,14.24 32.33,15.08 R11.1
N$29
  Top 0.203: 27.5,17.39 26.29,17.39 | 27.63,17.39 27.5,17.39 | 27.5,17.39 X4.4
  Top 0.254: NRF8001.28 30.81,15.52 30.05,16.28 28.74,16.28 27.63,17.39 | C28.1 26.29,17.39
N$30
  Top 0.203: X4.2 29.95,19.18 30.16,18.97
  Top 0.254: NRF8001.27 31.31,15.51 31.83,16.03 31.83,17.81 31.38,18.25 C29.1 30.16,18.97 29.82,19.24
RD_N  (via drill 0.3)
  Top 0.203: R3.1 7.48,12.37 v8.38,12.37
  Bottom 0.203: U1.3 12.1,13.77 8.84,13.77 8.38,13.31 v8.38,12.37
RD_P  (via drill 0.3)
  Top 0.254: R10.1 7.54,11.46 v7.7,11.61
  Bottom 0.203: U1.4 12.45,14.17 8.64,14.17 7.72,13.26 7.72,11.63 v7.7,11.61
RESET  (via drill 0.3, 0.38)
  Top 0.203: 15.82,17.04 15.67,17.2 15.67,20.5 v15.57,20.6 15.32,20.35 13.79,20.35 12.27,18.82 11.25,18.82 11.29,18.86 RESET.1
  Top 0.254: U3.29 16.08,15.52 15.82,15.77 15.82,17.04 | v8.15,19.58 8.15,19.45 RESET.3
  Top 0.406: RESET.3 RESET.1
  Inner-Top 0.254: v7.98,14.71 7.24,14.71 6.73,15.21 6.73,16.84 8.2,18.31 8.2,19.53 v8.15,19.58
  Bottom 0.203: U1.13 17.32,15.44 17.32,15.49 17.6,15.77 17.6,16.13 16.97,16.76 16.97,18.58 17.35,18.96
  Bottom 0.254: v7.98,14.71 6.17,12.9 6.17,7.14 5.72,6.68 4.29,6.68 3.68,6.07 3.68,3.63 4.14,3.18 JP1.2 | v15.57,20.6 15.67,20.5 15.67,19.33 16.04,18.96 17.35,18.96 R1.2 18.82,19.67 D1.2
RXLED/SS  (via drill 0.38)
  Top 0.254: v15.34,4.62 14.47,4.62 R7.1
  Inner-Bottom 0.254: v15.34,4.62 14.91,5.05 13.64,5.05 12.62,6.07 12.62,15.42 v11.76,16.28
  Bottom 0.254: U1.8 13.17,16.28 v11.76,16.28
SCK
  Bottom 0.203: 12.61,17.55 3.38,17.55 2.87,18.06 2.87,20.35 1.6,21.62 JP3.1
  Bottom 0.254: U1.9 12.61,17.55
TXLED  (via drill 0.3, 0.38)
  Top 0.254: R6.1 v14.15,3.78
  Inner-Top 0.254: 18.72,8.51 16.33,6.12
  Inner-Top 0.406: v22.17,12.17 22.17,10.95 19.74,8.51 18.72,8.51 | 16.33,6.12 16.33,4.34 15.77,3.78 v14.15,3.78
  Bottom 0.203: U1.22 20.53,12.37 21.97,12.37 v22.17,12.17
UCAP
  Bottom 0.254: U1.6 13.21,14.83 C5.1
VIN  (via drill 0.38)
  Inner-Bottom 0.61: v33.15,7.59 33.15,4.7 34.62,3.23 JP1.14
  Bottom 0.254: T1.3 33.1,7.37 v33.15,7.59 | 33.15,10.41 T2.1 33.12,11.6 R9.2
  Bottom 0.406: 33.15,10.41 v33.15,7.59
VUSB  (via drill 0.3, 0.38)
  Top 0.406: F2.1 4.09,5.36 4.1,5.37 C9.1 R2.2 4.09,7.51 v4.09,7.49
  5V 0.254: 14.83,2.95 13.41,2.95 13.28,3.07
  5V 0.406: 14.83,2.95 16.97,2.95 19.13,5.11 20.14,5.11 21.41,3.84 24.21,3.84 24.97,3.07 26.75,3.07 27.76,4.09 29.79,4.09 30.81,3.07 31.7,3.07 v32.59,3.96
  5V 1.016: 13.28,3.07 12.01,4.34 5.92,4.34 4.09,6.17 v4.09,7.49
  Bottom 0.254: U1.7 13.23,15.52 9.22,15.52 8.2,16.54 6.22,16.54 5.51,15.82 5.51,7.9 | v32.59,3.96 32.74,4.01 T1.1
  Bottom 0.305: 5.51,7.9 5.11,7.49 v4.09,7.49
VUSBD  (via drill 0.38)
  Top 0.254: 3.07,12.78 3.31,13.01 X2.VBUS | 3.07,6.58 3.07,6.5 F2.2
  Top 0.305: 3.07,12.78 3.07,6.58
  Top 0.406: F2.2 1.55,3.84 v1.4,3.94
  Bottom 0.305: C14.A 2.33,5.79
  Bottom 0.406: C14.A 2.33,4.62 v1.4,3.94
XTAL1
  Bottom 0.203: U1.17 19.79,15.16 26.14,15.16 26.49,15.52 26.49,16.54 26.05,16.98 C13.2 | X3.2 24.71,18.61 25.73,17.59
  Bottom 0.254: C13.2 25.73,17.59
XTAL2
  Bottom 0.203: U1.16 20.01,16.09 C12.2 22.46,16.09 22.65,16.28 X3.4

## Text on the board
tPlace: 10 | 9 | 8 | 7 | 6 | 5 | 4 | 3 | 2 | TX | RX | SCK | MISO | MOSI | AREF | Vin | 13 | RST | A5 | A4 | A3 | A2 | A1 | A0 | -GND- | 3V | 5V
bPlace: Main SPI | BLE SPI
tNames: JP3 | RESET | Y5 | JP1
bNames: + | +